# Altium PCB PIC.PcbDoc
Units mm, origin at the board's own origin, x right, y up, seen from the top; angles counter-clockwise.
Board outline 86.49 x 94.87 mm, 2 copper layers (Top Layer, Bottom Layer); 29 components, 42 nets, 126 pads, 10 vias.
Unrouted connection lines stored in the file: 2.
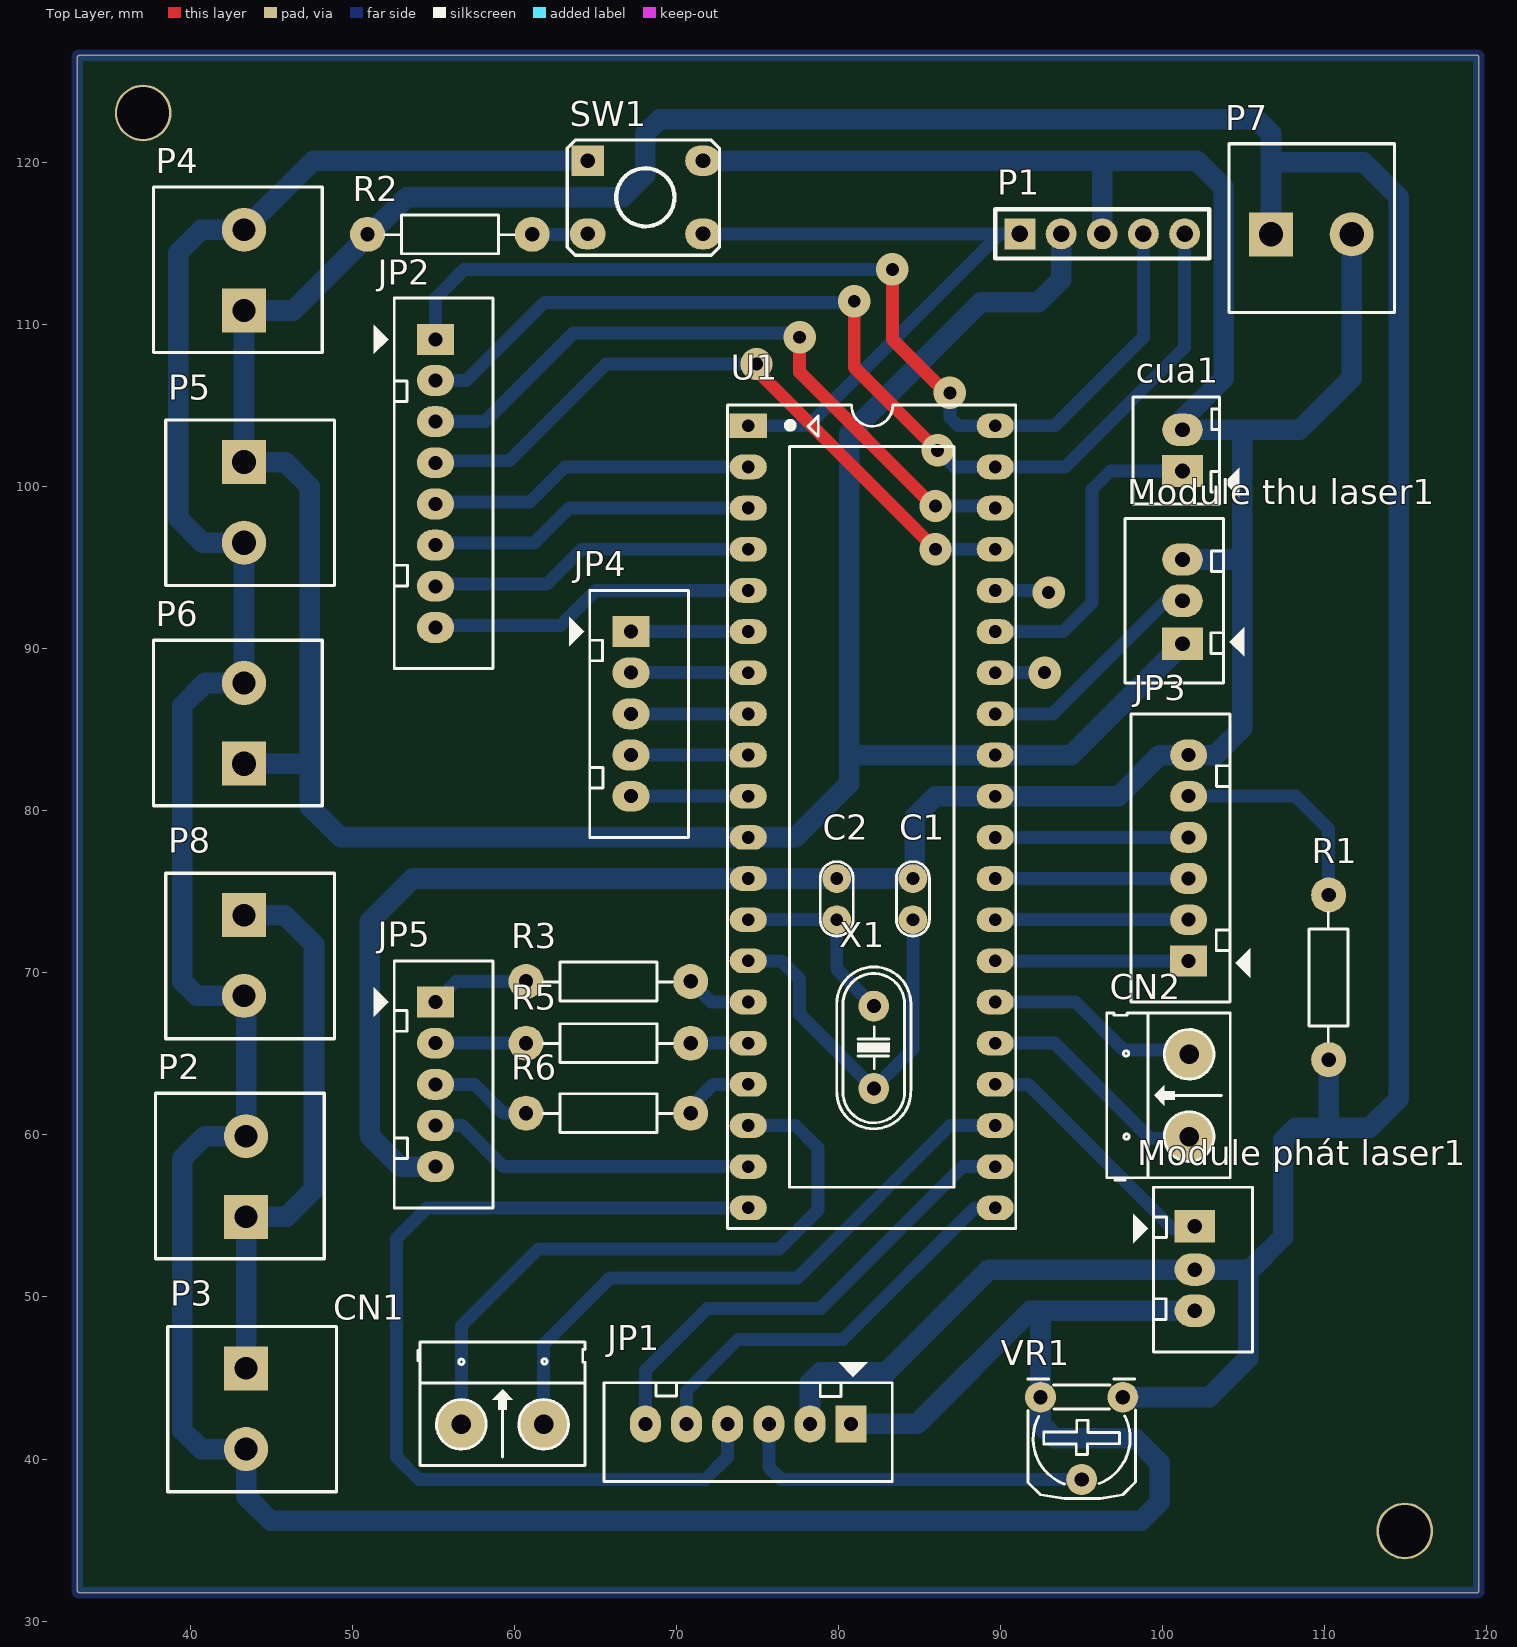
[diagram p0: Top Layer view]
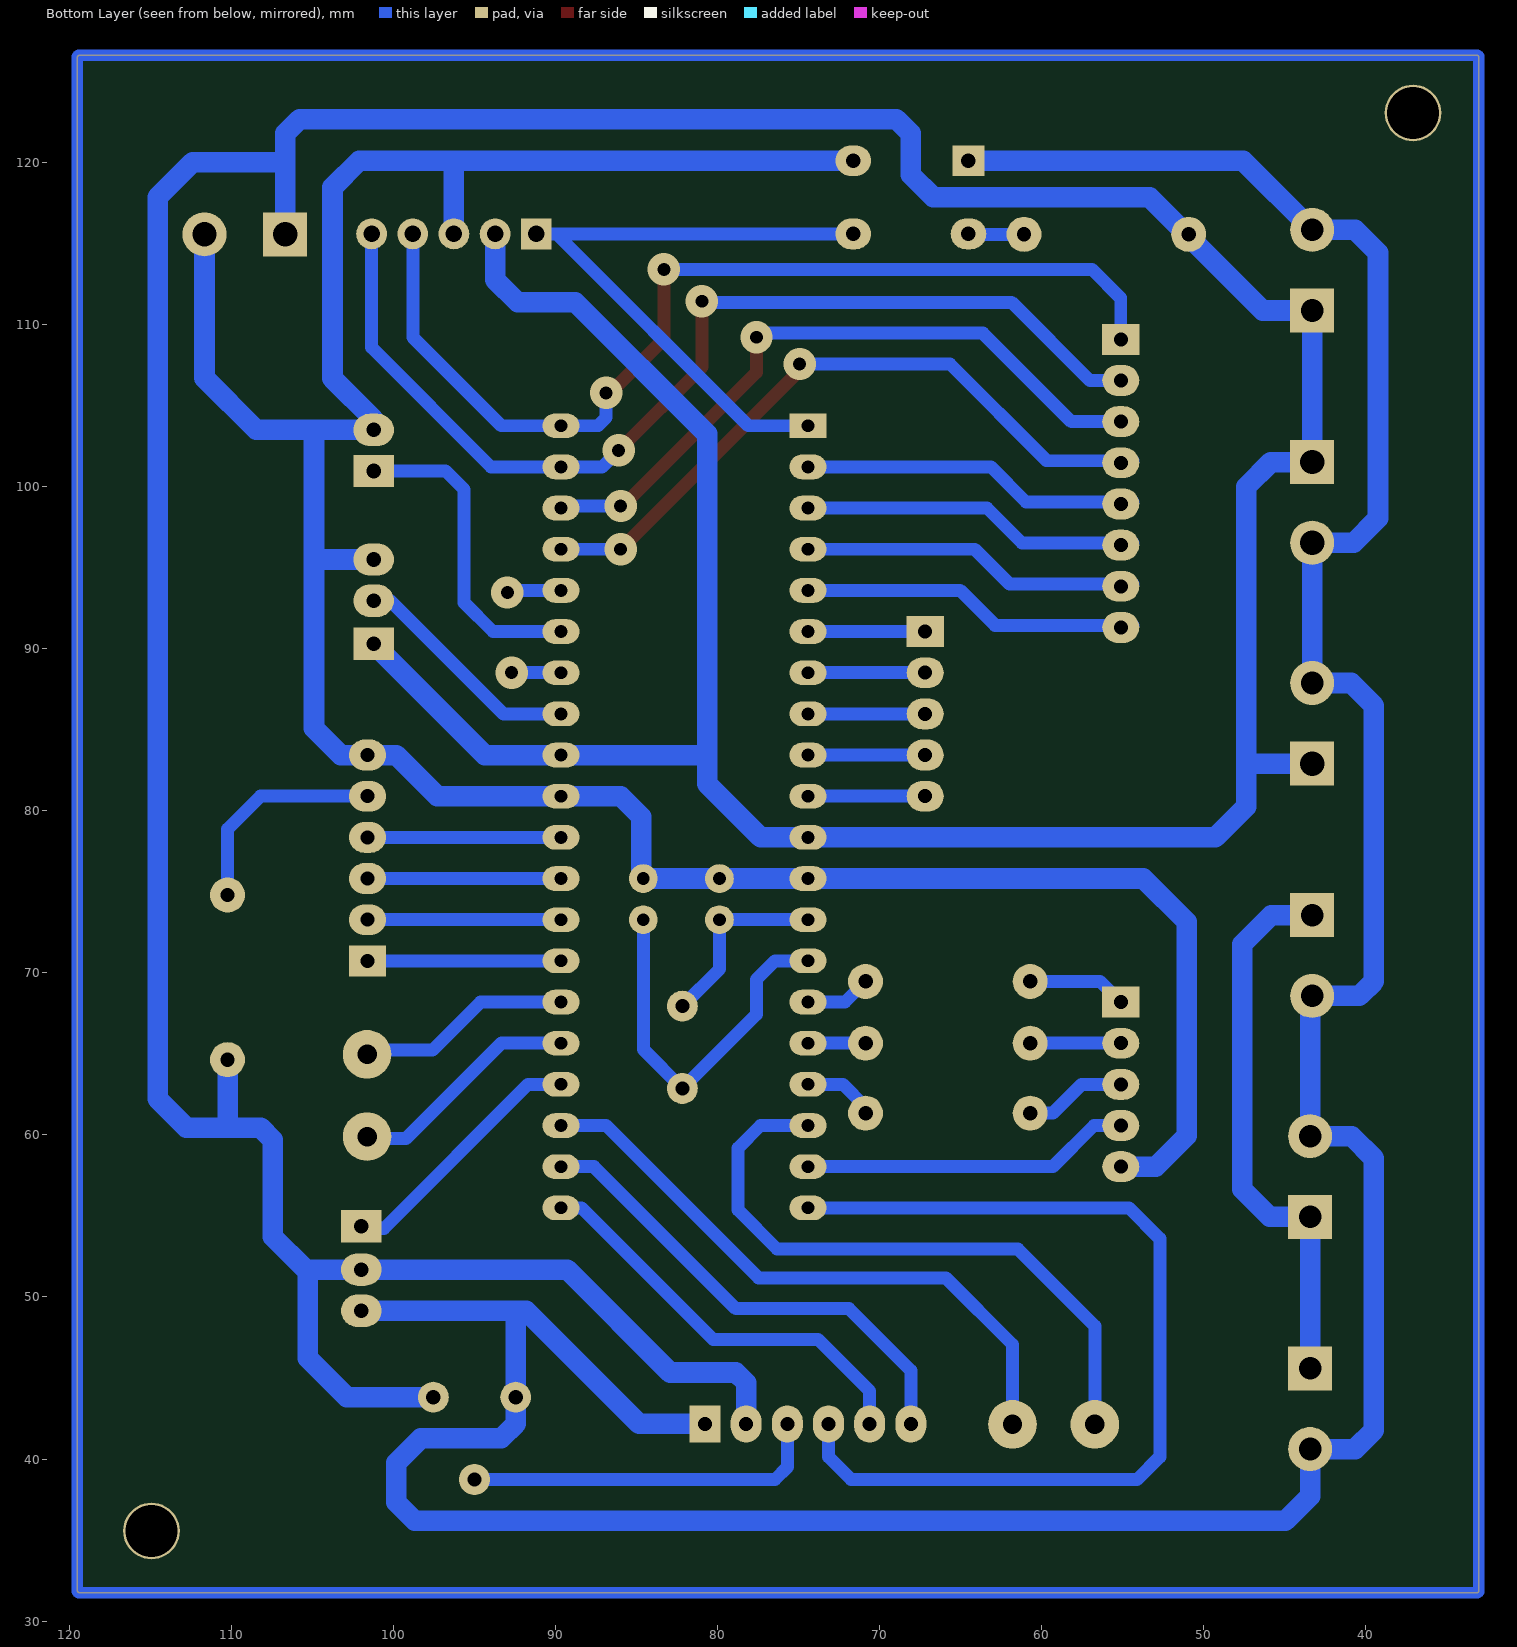
[diagram p1: Bottom Layer view, seen from below]
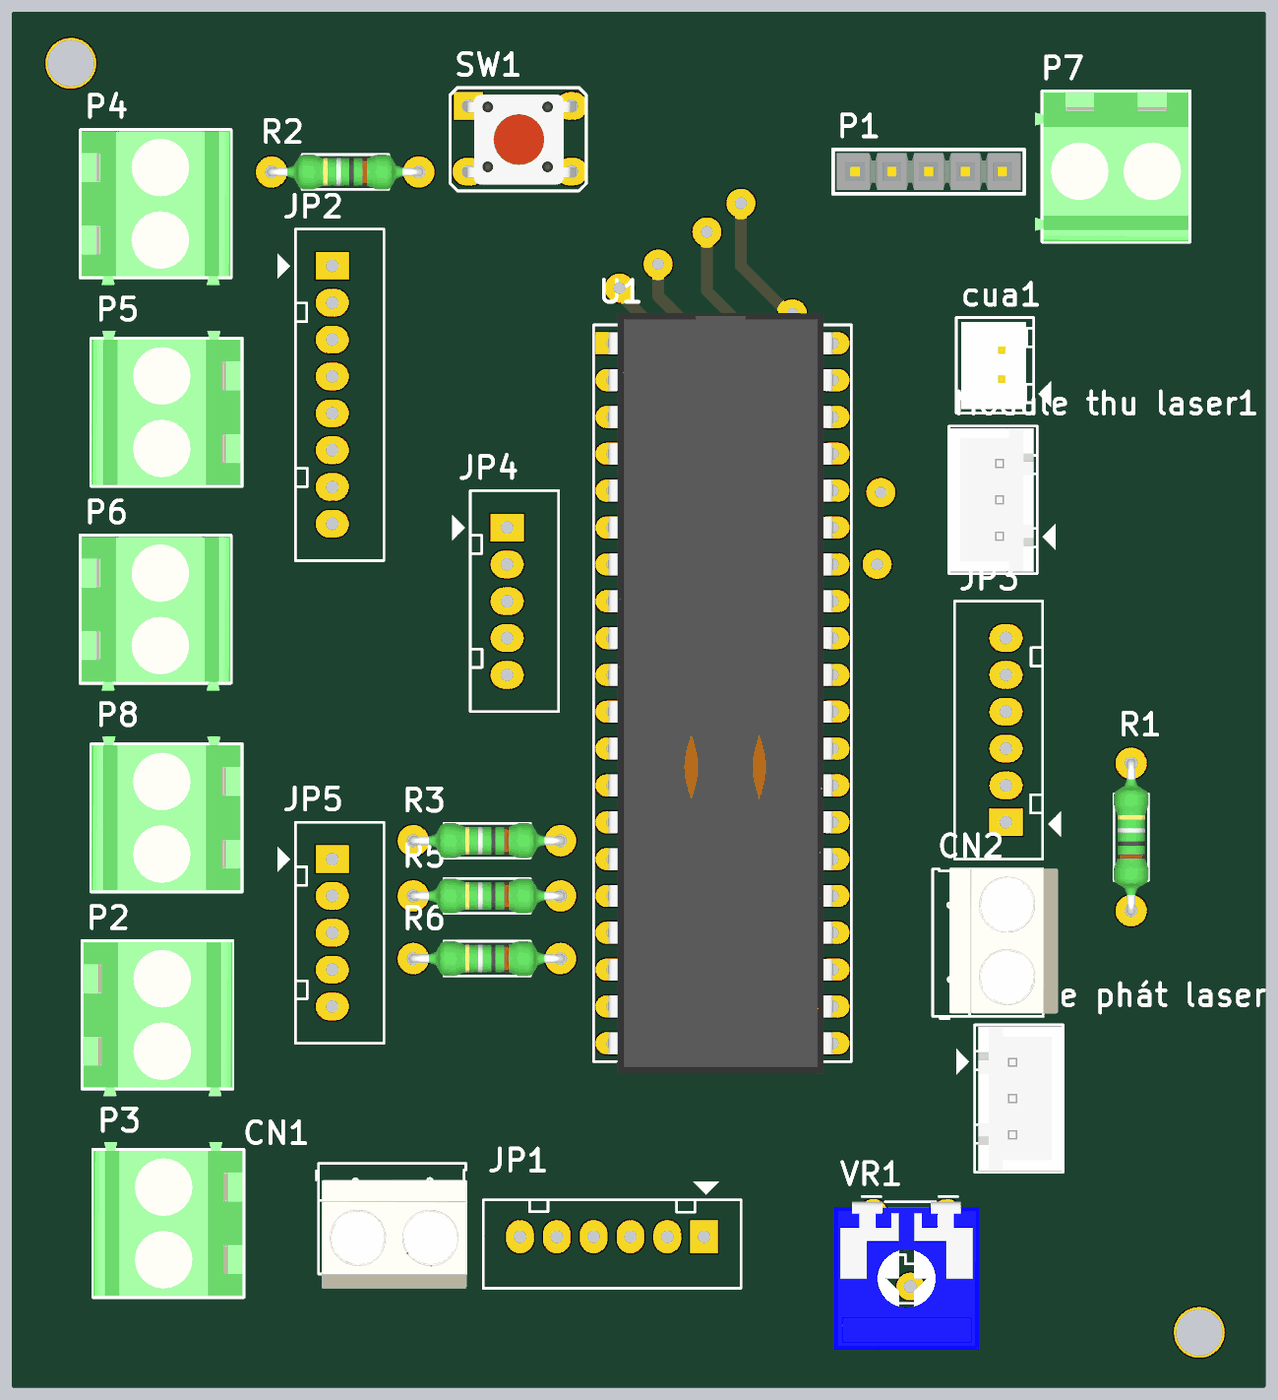
[diagram p2: 3D render of the assembled board from above, using the file's embedded part models]

## Layer stack, top to bottom
Top Solder: solder mask 0.0102, Solder Resist, Dk 3.5
Top Layer: signal copper 0.0356
Dielectric 1: dielectric 0.32, FR-4, Dk 4.8
Bottom Layer: signal copper 0.0356
Bottom Solder: solder mask 0.0102, Solder Resist, Dk 3.5

## Board outline
33.02,31.877 ccw(c33.147,31.877) 33.147,31.75 119.38,31.75 ccw(c119.38,31.877) 119.507,31.877 119.507,126.492 ccw(c119.38,126.492) 119.38,126.619 33.147,126.619 ccw(c33.147,126.492) 33.02,126.492

## Design rules (kind name [scope] priority, off if disabled: settings)
Clearance [All] p1: gap=0.4
PolygonConnect [All] p1: connectstyle=Relief reliefconductorwidth=0.254 reliefentries=4 polygonreliefangle="90 Angle" airgapwidth=0.254
RoutingVias [All] p1: holewidth=0.8 width=2 viastyle="Through Hole" minholewidth=0.711 minwidth=2 maxholewidth=0.8 maxwidth=1.27
SolderMaskExpansion [All] p1: expansion=0.102
Width [All] p1: maxlimit=1.27 minlimit=0.3 preferedwidth=0.8
30 further rules are at their usual default settings.

## Components (designator, comment, footprint, x,y, rotation, side; value= is the part's Value field where it differs from the comment)
C1 "22p" CN1 84.582,74.549 r90 top
C2 "22p" CN1 79.883,74.549 r90 top
CN1 "Con2/Header2" "Terminal Block2" 53.721,45.466 r0 top
CN2 "Con2/Header2" "Terminal Block2" 98.298,56.896 r90 top
cua1 "Con2/Header2" CON2-3 100.457,104.013 r90 top
JP1 "lcd_1" CON6 80.772,42.164 r180 top
JP2 "Key matrix" CON8 55.118,109.093 r270 top
JP3 "lcd_2" CON6 101.6,70.739 r90 top
JP4 "step motor" CON5 67.183,91.059 r270 top
JP5 "canh bao" CON5 55.118,68.199 r270 top
"Module phát laser1" "Con3/Header3" CON3-1 102.997,54.229 r270 top
"Module thu laser1" "Con3/Header3" CON3-1 100.203,90.424 r90 top
P1 "Nạp Pic" "Header 5" 91.186,115.595 r0 top
P2 "JACK_12V" "TBlock 2"#1 43.434,54.944 r90 top
P3 "JACK_12V" "TBlock 2"#1 43.434,45.593 r270 top
P4 "JACK_5V" "TBlock 2"#1 43.307,110.87 r90 top
P5 "JACK_12V" "TBlock 2"#2 43.307,101.518 r270 top
P6 "JACK_5V" "TBlock 2"#3 43.307,82.907 r90 top
P7 "JACK_5V" "TBlock 2"#2 106.68,115.57 r0 top
P8 "JACK_12V" "TBlock 2"#1 43.307,73.556 r270 top
R1 "10" RES-1/4W 110.109,69.342 r270 top
R2 "10K" RES-1/4W 56.388,115.443 r0 top
R3 "220" RES-1/4W 66.167,69.342 r0 top
R5 "220" RES-1/4W 66.167,65.532 r0 top
R6 "220" RES-1/4W 66.167,61.214 r0 top
SW1 "SW" "Nut Nhan 4P DIP" 68.072,117.856 r0 top
U1 "PIC16F887-PU" DIP40/W0.6 74.422,103.759 r270 top
VR1 "10K" VR 97.536,43.815 r180 top
X1 "20Mhz" XT2 82.169,65.405 r90 top

## Footprints (in the part's own frame and the unit in brackets; to place one, negate y for a bottom-side part, rotate by r counter-clockwise, add the part's x,y. Pads: shape width x height; smd on the part's side, far side on the other; paste and mask are expansions set on the pad)
CN1 [mil]
  round 70 hole 31: 1(-50,0) 2(50,0)
  silkscreen extent -90,-40 91,40, body extent -115,-33 115,33, height 265
CON2-3 [mm] "CON2 BLOCK"
  rect 2x2.5 hole 0.9: 1(-3.048,-0.762)
  oval 2x2.5 hole 0.9: 2(-0.508,-0.762)
  silkscreen extent -5.08,-4.25 1.52,2.29, body extent -4.78,-2.54 1.22,1.96, height 6
CON3-1 [mm] "CON3 BLOCK"
  rect 2x2.5 hole 0.9: 1(-0.127,-1.016)
  oval 2x2.5 hole 0.9: 2(2.54,-1.016) 3(5.08,-1.016)
  silkscreen extent -2.54,-4.81 7.62,2.54, body extent -2.41,-3.3 7.49,2.45, height 7
CON5 [mil] "CON5"
  rect 75x90 hole 34: 1(0,0)
  oval 75x90 hole 34: 2(100,0) 3(200,0) 4(300,0) 5(400,0)
  silkscreen extent -100,-150 500,140
CON6 [mil] "CON6"
  rect 75x90 hole 34: 1(0,0)
  oval 75x90 hole 34: 2(100,0) 3(200,0) 4(300,0) 5(400,0) 6(500,0)
  silkscreen extent -100,-150 600,140
CON8 [mil] "CON8"
  rect 75x90 hole 34: 1(0,0)
  oval 75x90 hole 34: 2(100,0) 3(200,0) 4(300,0) 5(400,0) 6(500,0) 7(600,0) 8(700,0)
  silkscreen extent -100,-150 800,140
DIP40/W0.6 [mil] "40 PIN, W 600mil, Pin to pin 100mil"
  rect 60x90 hole 31: 1(0,0)
  oval 60x90 hole 31: 2(100,0) 3(200,0) 4(300,0) 5(400,0) 6(500,0) 7(600,0) 8(700,0) 9(800,0) 10(900,0) 11(1000,0) 12(1100,0) 13(1200,0) 14(1300,0) 15(1400,0) 16(1500,0) 17(1600,0) 18(1700,0) 19(1800,0) 20(1900,0) 21(1900,600) 22(1800,600) 23(1700,600) 24(1600,600) 25(1500,600) 26(1400,600) 27(1300,600) 28(1200,600) 29(1100,600) 30(1000,600) 31(900,600) 32(800,600) 33(700,600) 34(600,600) 35(500,600) 36(400,600) 37(300,600) 38(200,600) 39(100,600) 40(0,600)
  silkscreen extent -50,-50 1950,650, body extent -82,-10 1982,600, height 224
"Header 5" [mil] "Connector; Header; 5 Position; Solder Pad 35mil"
  rect 75x75 hole 40: 1(0,0)
  round 75 hole 40: 2(100,0) 3(200,0) 4(300,0) 5(400,0)
  silkscreen extent -60,-60 460,60, body extent -50,-50 450,50, height 83
"Nut Nhan 4P DIP" [mm] "BUTTON SMORE 280mil x 178mil"
  rect 2x1.9 hole 0.9: 1(-3.556,2.261)
  oval 2.2x1.9 hole 0.9: 1(3.556,2.261) 2(-3.556,-2.261) 2(3.556,-2.261)
  silkscreen extent -4.83,-3.58 4.57,3.53, body extent -4.03,-3.15 3.87,3.05, height 7
RES-1/4W [mil]
  round 85 hole 35: 1(-215,5) 2(185,5)
  silkscreen extent -173,-42 141,52, body extent -227,-42 197,52, height 95
"TBlock 2"#1 [mil] "Connector; Terminal; 2 Positions; Solder Pad 35mil"
  rect 107x107 hole 55.12: 1(0,0)
  round 107 hole 55.12: 2(196,0)
  silkscreen extent -102,-190 300,220, body extent -122,-189 296,217, height 560
"TBlock 2"#2 [mil] "Connector; Terminal; 2 Positions; Solder Pad 35mil"
  rect 107x107 hole 59.06: 1(0,0)
  round 107 hole 59.06: 2(196,0)
  silkscreen extent -102,-190 300,220, body extent -122,-189 296,217, height 560
"TBlock 2"#3 [mil] "Connector; Terminal; 2 Positions; Solder Pad 35mil"
  rect 107x107 hole 59.06: 1(0,0)
  round 107 hole 55.12: 2(196,0)
  silkscreen extent -102,-190 300,220, body extent -122,-189 296,217, height 560
"Terminal Block2" [mm] "Terminal Blcok 2 position,pitch=5mm"
  round 3 hole 1.2: 1(2.997,-3.327) 2(8.077,-3.327)
  silkscreen extent 0.3,-5.87 10.62,1.75, body extent 0.66,-6.88 10.66,0.62, height 10
VR [mil] "Resistor Variable"
  round 75 hole 35: 1(0,0) 2(100,200) 3(200,0)
  silkscreen extent -31,-44 231,246, body extent -87,-30 307,372, height 165
XT2 [mil] "Footpin for Crystal 2 pin"
  round 75 hole 34: 1(-100,0) 2(100,0)
  silkscreen extent -198,-90 195,90, body extent -233,-93 213,90, height 138

## Part data
C1 C2: library part CN2, "Cap np 104 => 105pF"
CN1 CN2 cua1: "CON2"
JP1 JP3: library part Con6, "Connector 6"
JP2: library part Con8, "Connector 8"
JP4 JP5: library part Con5, "Connector 5"
"Module phát laser1" "Module thu laser1": "CON3"
P1: library part "Header 5", "Header, 5-Pin"
P2 P3 P4 P5 P6 P7 P8: library part "Header 2", "Header, 2-Pin"
R1 R2 R3 R5 R6: library part Res, "Res"
SW1: library part SW2, "Switch button 2 pin"
U1: "Flash-Based, 8-Bit CMOS Microcontroller with nanoWatt Technology, 8K (x14-Bit words) Program Memory, 624 Bytes Data Memory, 35 I/O pins, 40-Pin PDIP, Standard VDD Range, Extended Temperature"
VR1: library part VR1, "Var Resistor"
X1: library part XT2, "Crystal For all Crystal 2pin."

## Free pads (board coordinates)
  round 3.5 hole 3.2: 0(37.084,123.063) 0(114.935,35.56)

## Via types
v1: diameter 2, hole 0.8, Top Layer to Bottom Layer, 10 vias

## Nets (pads, with @x,y where several pads share a name; then routed paths per layer and width w, separated by ;. In a path a pad name is that pad's centre, name@x,y a point inside that pad or via, vN(x,y) a via of type N, cw(c..) or ccw(c..) an arc to the next point about the centre after c; other vN are vias at no path point)
+5: "Module phát laser1.2" "Module thu laser1.1" JP1.2 P1.2 P4.1 P5.1 P6.1 P7.1 R1.2 R2.1 U1.11 U1.32 VR1.1 | length 346.9
  Bottom Layer w1.27: P6.1 47.371,82.907 ; JP1.2 78.232,44.704 78.867,45.339 82.93,45.339 89.28,51.689 101.981,51.689 105.41,51.689 ; 80.645,83.439 U1.32 94.361,83.439 101.219,90.297 ; 80.645,103.251 80.645,81.661 77.343,78.359 U1.11 49.276,78.359 47.371,80.264 47.371,82.907 ; 80.772,103.378 88.773,111.379 92.329,111.379 93.726,112.776 P1.2 ; VR1.1 102.87,43.815 105.283,46.228 105.283,51.562 105.41,51.689 ; P7.1 106.68,119.761 ; R1.2 110.236,60.452 ; 47.371,82.907 47.371,99.994 45.847,101.518 P5.1 P4.1 46.354,110.87 53.34,117.856 66.675,117.856 68.072,119.253 68.072,121.793 68.961,122.682 105.791,122.682 106.68,121.793 106.68,119.761 ; 105.41,51.689 107.442,53.721 107.442,59.69 108.204,60.452 110.236,60.452 ; 106.68,119.761 106.934,120.015 112.395,120.015 114.554,117.856 114.554,62.23 112.776,60.452 110.236,60.452
+12: P2.1 P3.1 P8.1 | length 34.4
  Bottom Layer w1.27: P8.1 45.824,73.556 47.625,71.755 47.625,56.642 45.927,54.944 P2.1 P3.1
BUZZER: JP5.4 U1.19 | length 20.7
  Bottom Layer w0.8: JP5.4@54.864,60.833 JP5.4 56.769,60.579 59.309,58.039 U1.19
DIR: JP4.1 U1.6 | length 7.2
  Bottom Layer w0.8: JP4.1 U1.6
DOOR: cua1.1 U1.35 | length 19.8
  Bottom Layer w0.8: U1.35 93.853,91.059 95.631,92.837 95.631,99.822 96.774,100.965 cua1.1
ENABLE: JP4.5 U1.10 | length 7.2
  Bottom Layer w0.8: JP4.5 U1.10
GND: "Module phát laser1.3" "Module thu laser1.3" C1.2 C2.2 cua1.2 JP1.1 JP3.6 JP5.5 P1.3 P2.2 P3.2 P4.2 P5.2 P6.2 P7.2 P8.2 SW1.1 U1.12 U1.31 VR1.3 | length 394.7
  Bottom Layer w1.27: JP5.5 52.959,58.039 51.054,59.944 51.054,73.152 53.721,75.819 U1.12 C2.2 C1.2 84.709,75.946 84.709,79.629 85.979,80.899 U1.31 97.282,80.899 99.822,83.439 JP3.6 103.251,83.439 104.902,85.09 104.902,95.504 ; SW1.1@64.643,120.269 64.491,120.117 47.576,120.117 P4.2 40.664,115.848 39.243,114.427 39.243,98.044 40.747,96.54 P5.2 P6.2 40.894,87.885 39.497,86.488 39.497,69.469 40.389,68.577 P8.2 43.434,68.45 P2.2 40.873,59.923 39.497,58.547 39.497,41.783 40.665,40.615 P3.2 43.434,37.719 44.958,36.195 98.679,36.195 99.822,37.338 99.822,39.751 98.298,41.275 93.345,41.275 92.456,42.164 VR1.3 92.456,48.514 91.821,49.149 ; SW1.1@71.628,120.117 96.266,120.117 ; JP1.1 84.836,42.164 91.821,49.149 ; P1.3 96.266,120.015 ; 96.393,120.117 102.108,120.117 103.759,118.466 103.759,106.68 101.219,104.14 cua1.2 108.458,103.505 111.658,106.705 P7.2 ; 101.219,95.504 104.902,95.504 ; 101.981,49.149 91.821,49.149 ; 104.902,103.251 104.902,95.504
"LASER OUTPUT": "Module thu laser1.2" U1.33 | length 14.5
  Bottom Layer w0.8: U1.33 93.218,85.979 100.203,92.964 101.219,92.964
"LASER SIGNAL": "Module phát laser1.1" U1.24 | length 17.1
  Bottom Layer w0.8: U1.24 91.694,63.119 100.584,54.229 102.108,54.229 ; 100.965,54.356 101.981,54.356
LCD_A: JP3.5 R1.1 | length 13.5
  Bottom Layer w0.8: JP3.5 108.204,80.899 110.236,78.867 R1.1
LCD_D4: JP3.1 U1.27 | length 11.9
  Bottom Layer w0.8: U1.27 JP3.1
LCD_D5: JP3.2 U1.28 | length 11.9
  Bottom Layer w0.8: U1.28 JP3.2
LCD_D6: JP3.3 U1.29 | length 11.9
  Bottom Layer w0.8: U1.29 JP3.3
LCD_D7: JP3.4 U1.30 | length 12.5
  Bottom Layer w0.8: U1.30 JP3.4 ; JP3.4@100.838,78.359 JP3.4@101.219,77.978
LCD_E: JP1.6 U1.22 | length 30.1
  Bottom Layer w0.8: JP1.6 68.072,45.466 71.882,49.276 78.867,49.276 87.63,58.039 U1.22
LCD_POT: JP1.3 VR1.2 | length 22.3
  Bottom Layer w0.8: JP1.3 75.692,39.497 76.454,38.735 VR1.2
LCD_RS: JP1.4 U1.20 | length 59.6
  Bottom Layer w0.8: JP1.4 73.152,40.132 71.755,38.735 54.102,38.735 52.705,40.132 52.705,53.594 54.61,55.499 U1.20
LCD_RW: JP1.5 U1.21 | length 25.8
  Bottom Layer w0.8: JP1.5 70.612,44.196 73.787,47.371 80.264,47.371 88.392,55.499 U1.21
LED_DOOR: R3.2 U1.15 | length 4.1
  Bottom Layer w0.8: R3.2 72.136,68.199 U1.15
LED_LIQUID: R5.2 U1.16 | length 3.6
  Bottom Layer w0.8: R5.2 U1.16
LED_SET: R6.2 U1.17 | length 4.5
  Bottom Layer w0.8: R6.2 70.866,61.722 72.263,63.119 U1.17
M0: JP4.4 U1.9 | length 7.2
  Bottom Layer w0.8: JP4.4 U1.9
M1: JP4.3 U1.8 | length 7.2
  Bottom Layer w0.8: JP4.3 U1.8
MCLR: P1.1 R2.2 SW1.2 U1.1 | length 43.4
  Bottom Layer w0.8: R2.2 SW1.2@64.491,115.57 ; SW1.2@71.628,115.595 89.941,115.595 ; U1.1 78.105,103.759 89.941,115.595 ; P1.1 89.941,115.595
NetC1_1: C1.1 U1.14 X1.1 | length 23.7
  Bottom Layer w0.8: U1.14 76.454,70.739 77.597,69.596 77.597,67.437 X1.1 84.582,65.278 C1.1
NetC2_1: C2.1 U1.13 X1.2 | length 11.7
  Bottom Layer w0.8: U1.13 C2.1 79.883,70.231 X1.2
NetJP5_1: JP5.1 R3.1 | length 6.1
  Bottom Layer w0.8: JP5.1 56.388,69.469 R3.1
NetJP5_2: JP5.2 R5.1 | length 5.6
  Bottom Layer w0.8: JP5.2 R5.1
NetJP5_3: JP5.3 R6.1 | length 6.7
  Bottom Layer w0.8: JP5.3@54.864,63.373 JP5.3 57.531,63.119 59.309,61.341 R6.1
"PIN 18": CN1.1 U1.18 | length 39.8
  Bottom Layer w0.8: CN1.1 56.718,48.209 61.468,52.959 76.327,52.959 78.74,55.372 78.74,59.182 77.343,60.579 U1.18
"PIN 23": CN1.2 U1.23 | length 38.4
  Bottom Layer w0.8: CN1.2 61.798,47.066 65.913,51.181 77.47,51.181 86.868,60.579 U1.23
"PIN 25": CN2.1 U1.25 | length 14.7
  Bottom Layer w0.8: U1.25 93.345,65.659 99.238,59.766 CN2.1@101.905,59.766
"PIN 26": CN2.2 U1.26 | length 11.8
  Bottom Layer w0.8: U1.26 94.615,68.199 97.587,65.227 CN2.2@100.254,65.227
RA0: JP2.5 U1.2 | length 21
  Bottom Layer w0.8: JP2.5@54.356,99.06 60.96,99.06 63.119,101.219 U1.2
RA1: JP2.6 U1.3 | length 21
  Bottom Layer w0.8: JP2.6@54.356,96.52 61.214,96.52 63.373,98.679 U1.3
RA2: JP2.7 U1.4 | length 21
  Bottom Layer w0.8: JP2.7@54.356,93.98 61.976,93.98 64.135,96.139 U1.4
RA3: JP2.8 U1.5 | length 21
  Bottom Layer w0.8: JP2.8@54.356,91.44 62.865,91.44 65.024,93.599 U1.5
RB4: JP2.4 U1.37 | length 42.7
  Top Layer w0.8: v1(74.93,107.569) 74.93,107.188 v1(85.979,96.139)
  Bottom Layer w0.8: JP2.4@54.356,101.6 59.69,101.6 65.659,107.569 v1(74.93,107.569) ; v1(85.979,96.139) U1.37
RB5: JP2.3 U1.38 | length 42.4
  Top Layer w0.8: v1(77.597,109.22) 77.597,107.055 85.846,98.806 v1(85.979,98.806)
  Bottom Layer w0.8: JP2.3 58.166,104.013 63.627,109.474 v1@77.47,109.474 ; v1(85.979,98.806) 89.281,98.806 89.535,98.552 U1.38
RB6: JP2.2 P1.5 U1.39 | length 64.9
  Top Layer w0.8: v1(80.962,111.442) 80.962,107.379 v1(86.106,102.235)
  Bottom Layer w0.8: JP2.2 57.023,106.553 61.849,111.379 80.899,111.379 v1(80.962,111.442) ; v1(86.106,102.235) 87.122,101.219 U1.39 93.98,101.219 101.346,108.585 P1.5
RB7: JP2.1 P1.4 U1.40 | length 63
  Top Layer w0.8: v1(83.312,113.411) 83.312,109.093 86.614,105.791 v1(86.868,105.791)
  Bottom Layer w0.8: JP2.1 55.118,111.633 56.896,113.411 v1(83.312,113.411) ; v1(86.868,105.791) 86.868,104.267 87.376,103.759 U1.40 93.345,103.759 98.806,109.22 P1.4
STEP: JP4.2 U1.7 | length 7.2
  Bottom Layer w0.8: JP4.2 U1.7
pads on no net: U1.34 U1.36
copper on no net: | length 730.5
  Bottom Layer w0.254: 33.147,31.877 119.38,31.877 119.38,126.492 33.147,126.492 33.147,31.877
  Bottom Layer w0.7: 33.02,31.877 ccw(c33.147,31.877) 33.147,31.75 119.38,31.75 ccw(c119.38,31.877) 119.507,31.877 119.507,126.492 ccw(c119.38,126.492) 119.38,126.619 33.147,126.619 ccw(c33.147,126.492) 33.02,126.492 33.02,31.877
  Bottom Layer w0.8: 89.662,88.519 v1@92.456,88.519 ; 89.662,93.599 v1@92.837,93.599
  Bottom Layer w1.27: v1@92.456,88.519 v1@92.456,88.646 ; v1@92.837,93.599 v1(92.964,93.472)
  other v1: 92.71,88.519